# Altium PCB PCB2.PcbDoc
Units mm, origin at the board's own origin, x right, y up, seen from the top; angles counter-clockwise.
Board outline 100 x 15 mm, 2 copper layers (Top Layer, Bottom Layer); 2 components, 3 nets, 5 pads, 0 vias.
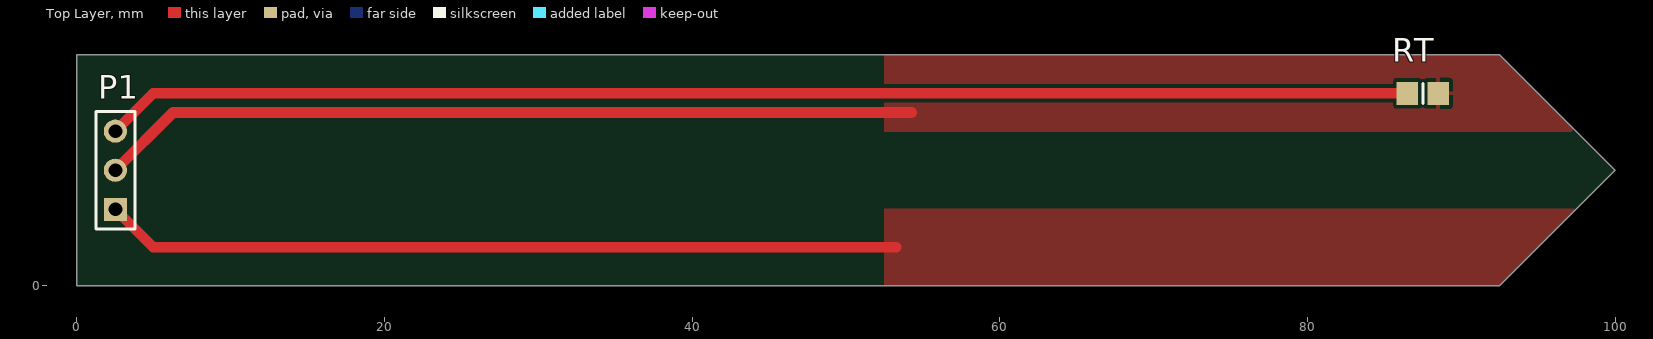
[diagram p0: Top Layer view]
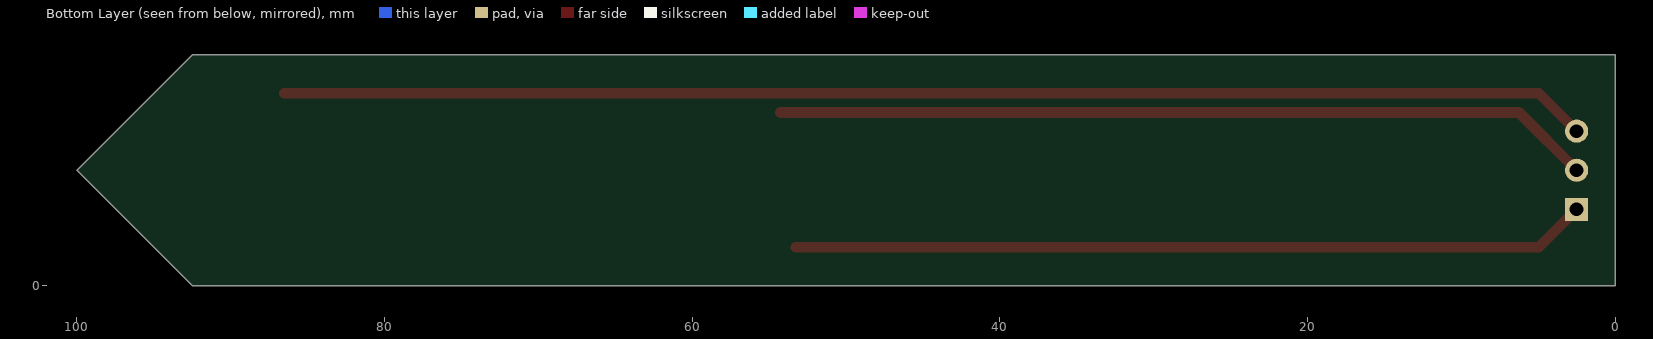
[diagram p1: Bottom Layer view, seen from below]

## Layer stack, top to bottom
Top Solder: solder mask 0.0102, Solder Resist, Dk 3.5
Top Layer: signal copper 0.0356
Dielectric 1: dielectric 0.32, FR-4, Dk 4.8
Bottom Layer: signal copper 0.0356
Bottom Solder: solder mask 0.0102, Solder Resist, Dk 3.5

## Board outline
0,0 92.5,0 100,7.5 92.5,15 0,15

## Design rules (kind name [scope] priority, off if disabled: settings)
Clearance [All] p1: gap=0.254 ignorepadtopadclearanceinfootprint=FALSE except(0: Arc-Hole Track-Hole SMDPad-Hole THPad-Hole Via-Hole Fill-Hole Poly-Hole Region-Hole Text-Hole; 0.4: Arc-Arc Arc-Track Track-Track)
PolygonConnect [All] p1: connectstyle=Relief reliefconductorwidth=0.254 reliefentries=4 polygonreliefangle="90 Angle" airgapwidth=0.254
RoutingVias [All] p1: holewidth=0.711 width=1.27 viastyle="Through Hole" minholewidth=0.711 minwidth=1.27 maxholewidth=0.711 maxwidth=1.27
SolderMaskExpansion [All] p1: expansion=0.102
Width [All] p1: maxlimit=0.7 minlimit=0.254 preferedwidth=0.254
30 further rules are at their usual default settings.

## Components (designator, comment, footprint, x,y, rotation, side; value= is the part's Value field where it differs from the comment)
P1 "Header 3" HDR1X3 2.5,4.96 r90 top
RT "Res Thermal" 6-0805_M 87.5,12.5 r0 top

## Footprints (in the part's own frame and the unit in brackets; to place one, negate y for a bottom-side part, rotate by r counter-clockwise, add the part's x,y. Pads: shape width x height; smd on the part's side, far side on the other; paste and mask are expansions set on the pad)
6-0805_M [mm] "Chip Resistor, Body 2.0x1.2mm, IPC Low Density"
  rect 1.4x1.5 smd: 1(-1,0) 2(1,0)
  silkscreen extent 0,-0.65 0,0.65, body extent -1.07,-0.7 1.07,0.7, height 0.7
HDR1X3 [mm] "Connector; Header; 3 Position"
  rect 1.5x1.5 hole 0.9: 1(0,0)
  round 1.5 hole 0.9: 2(2.54,0) 3(5.08,0)
  silkscreen extent -1.27,-1.27 6.35,1.27

## Part data
P1: "Header, 3-Pin", LatestRevisionDate=17-Jul-2002, LatestRevisionNote="Re-released for DXP Platform.", Publisher="Altium Limited"
RT: "Thermistor", Code_IPC=RESC2012, LatestRevisionDate=29-May-2009, LatestRevisionNote="IPC-7351 Footprint Added.", PackageDescription="Chip Resistor 0805 Case Size", PackageReference=6-0805, PackageVersion=Mar-2003, Published=24-Mar-1999, Publisher="Altium Limited"

## Nets (pads, with @x,y where several pads share a name; then routed paths per layer and width w, separated by ;. In a path a pad name is that pad's centre, name@x,y a point inside that pad or via, vN(x,y) a via of type N, cw(c..) or ccw(c..) an arc to the next point about the centre after c; other vN are vias at no path point)
gnd_probe: P1.2 RT.2 | length 53.3
  Top Layer w0.7: P1.2 6.25,11.25 54.25,11.25
sign_probe: P1.1 | length 51.8
  Top Layer w0.7: P1.1 4.96,2.5 53.25,2.5
temp: P1.3 RT.1 | length 85
  Top Layer w0.7: P1.3 4.96,12.5 RT.1

## Polygon pours and split planes (outlines as drawn)
gnd_probe on Top Layer "Top Layer-No Net" (solid, pour order 4): 92.5,15 52.5,15 52.5,10 97.5,10
sign_probe on Top Layer "Top Layer-No Net" (solid, pour order 6): 92.5,0 97.5,5 52.5,5 52.5,0

## Silkscreen, mask and mechanical layers (free items; w line width, h text height)
Mechanical 29:
  the board outline again, w0.254